# Altium PCB Powerboard.PcbDoc
Units mil, origin at the board's own origin, x right, y up, seen from the top; angles counter-clockwise.
Board outline 3937.01 x 3937.01 mil, 2 copper layers (Top Layer, Bottom Layer); 70 components, 52 nets, 248 pads, 58 vias.
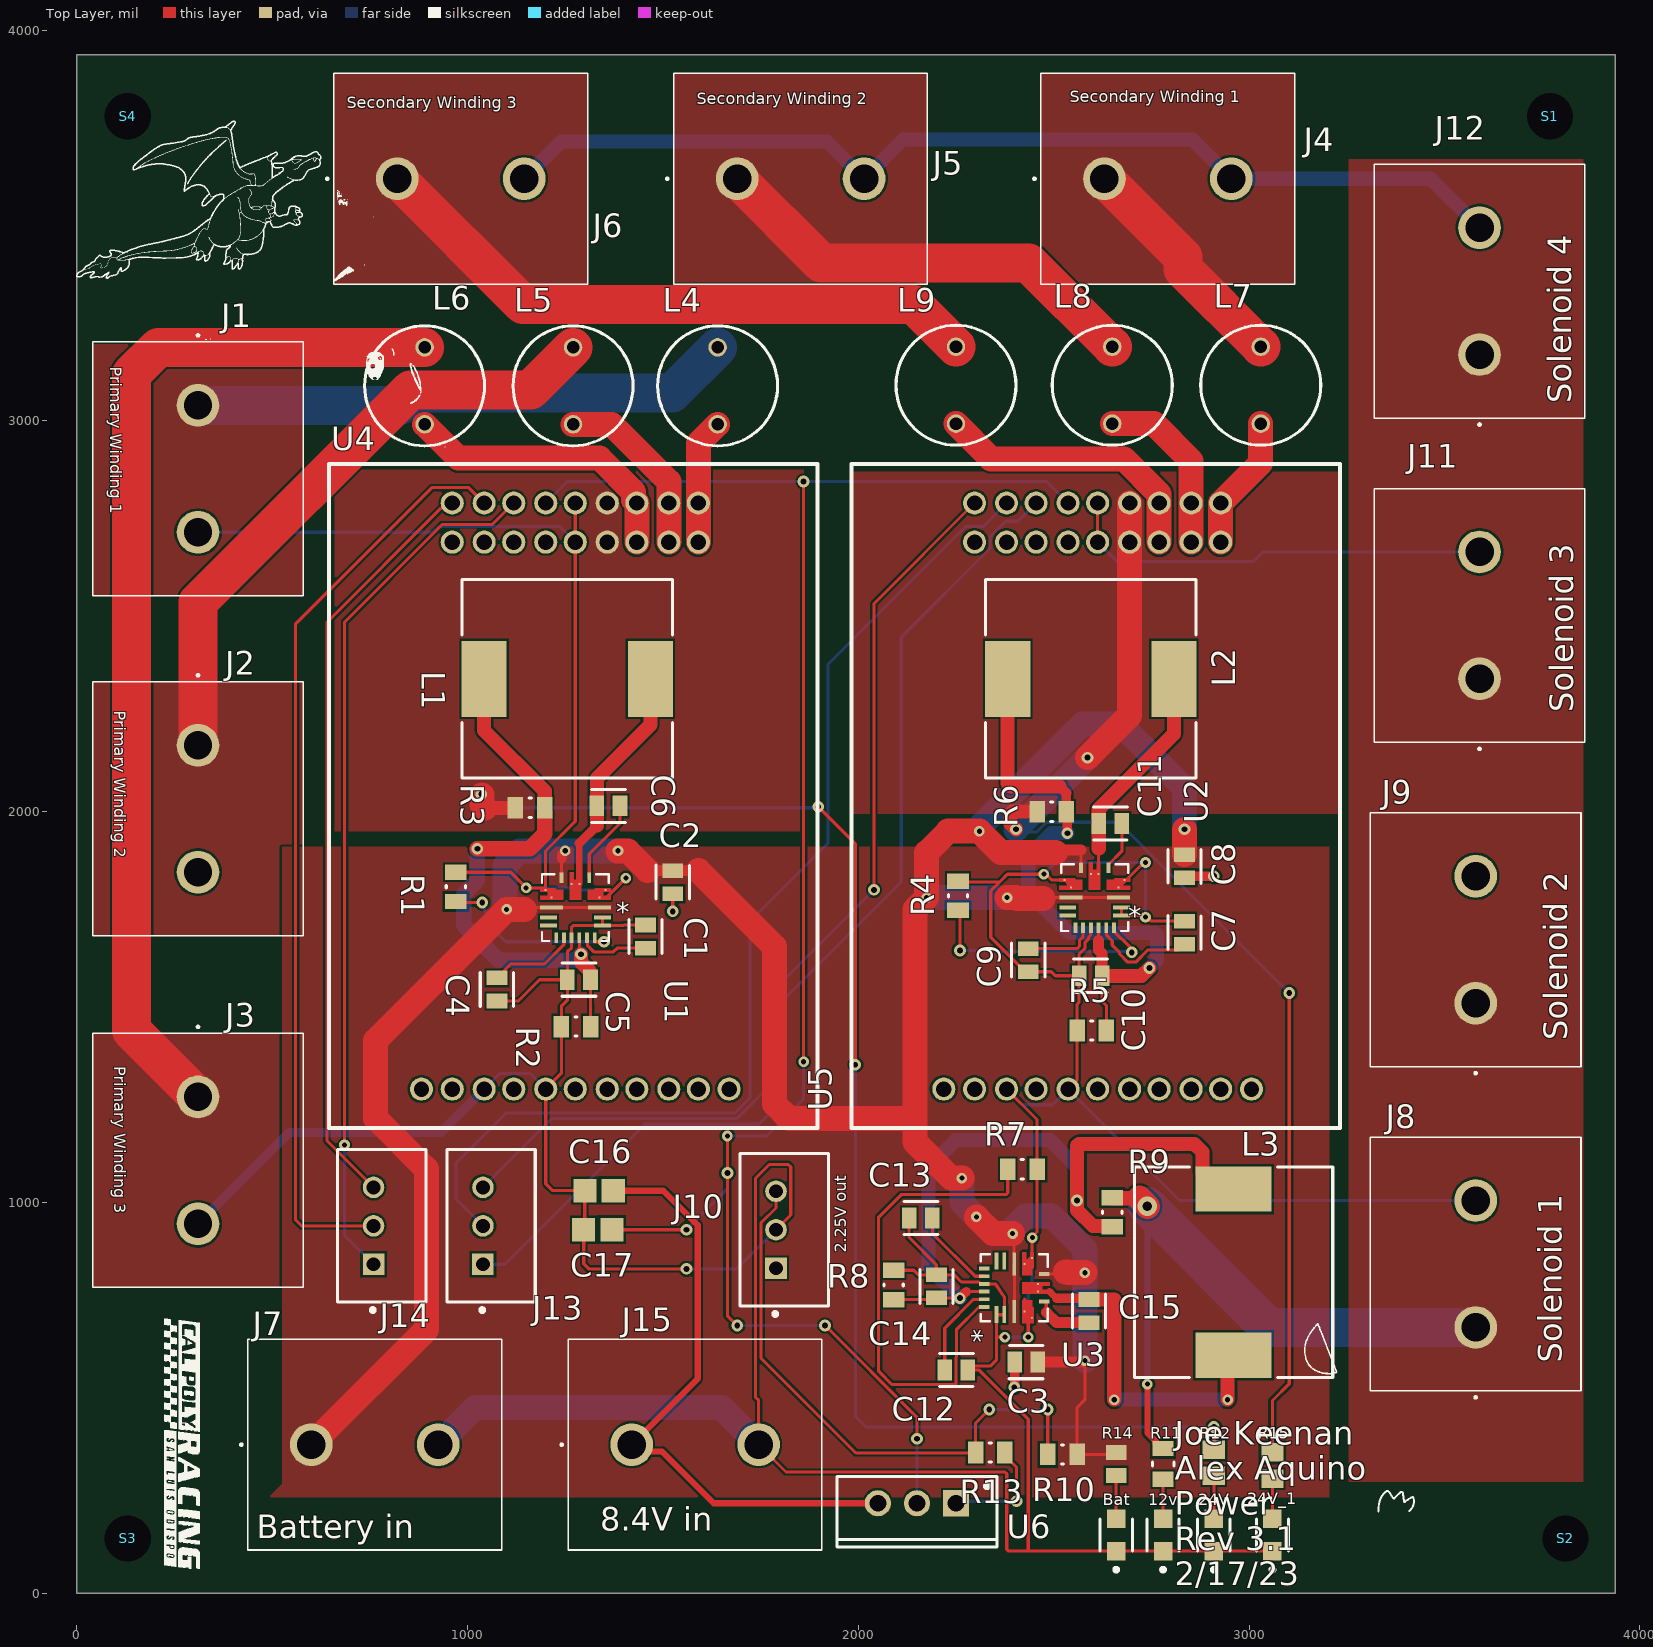
[diagram p0: Top Layer view]
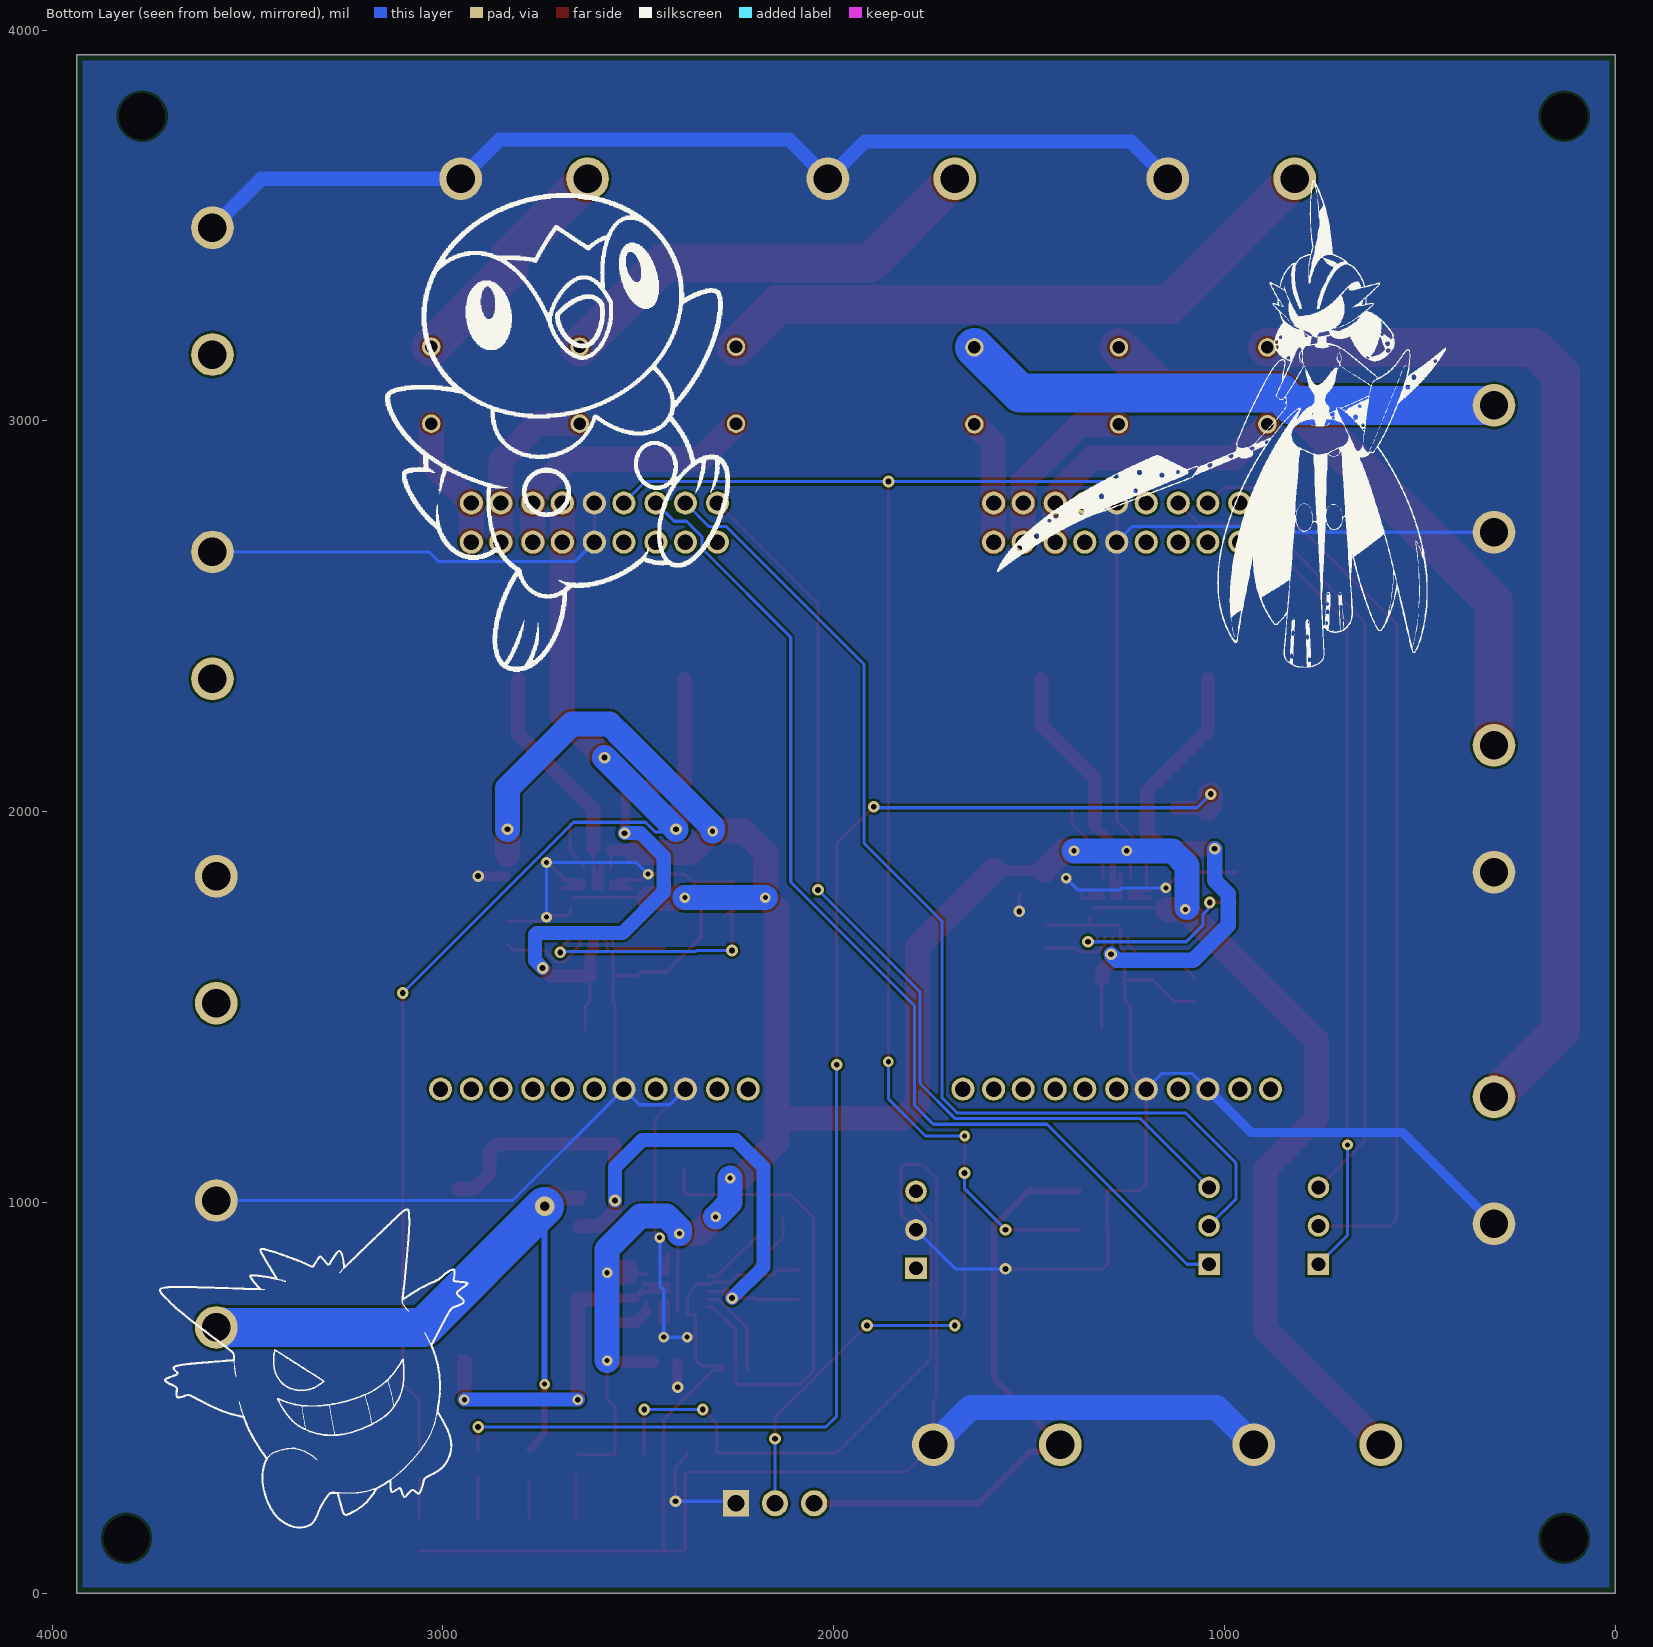
[diagram p1: Bottom Layer view, seen from below]
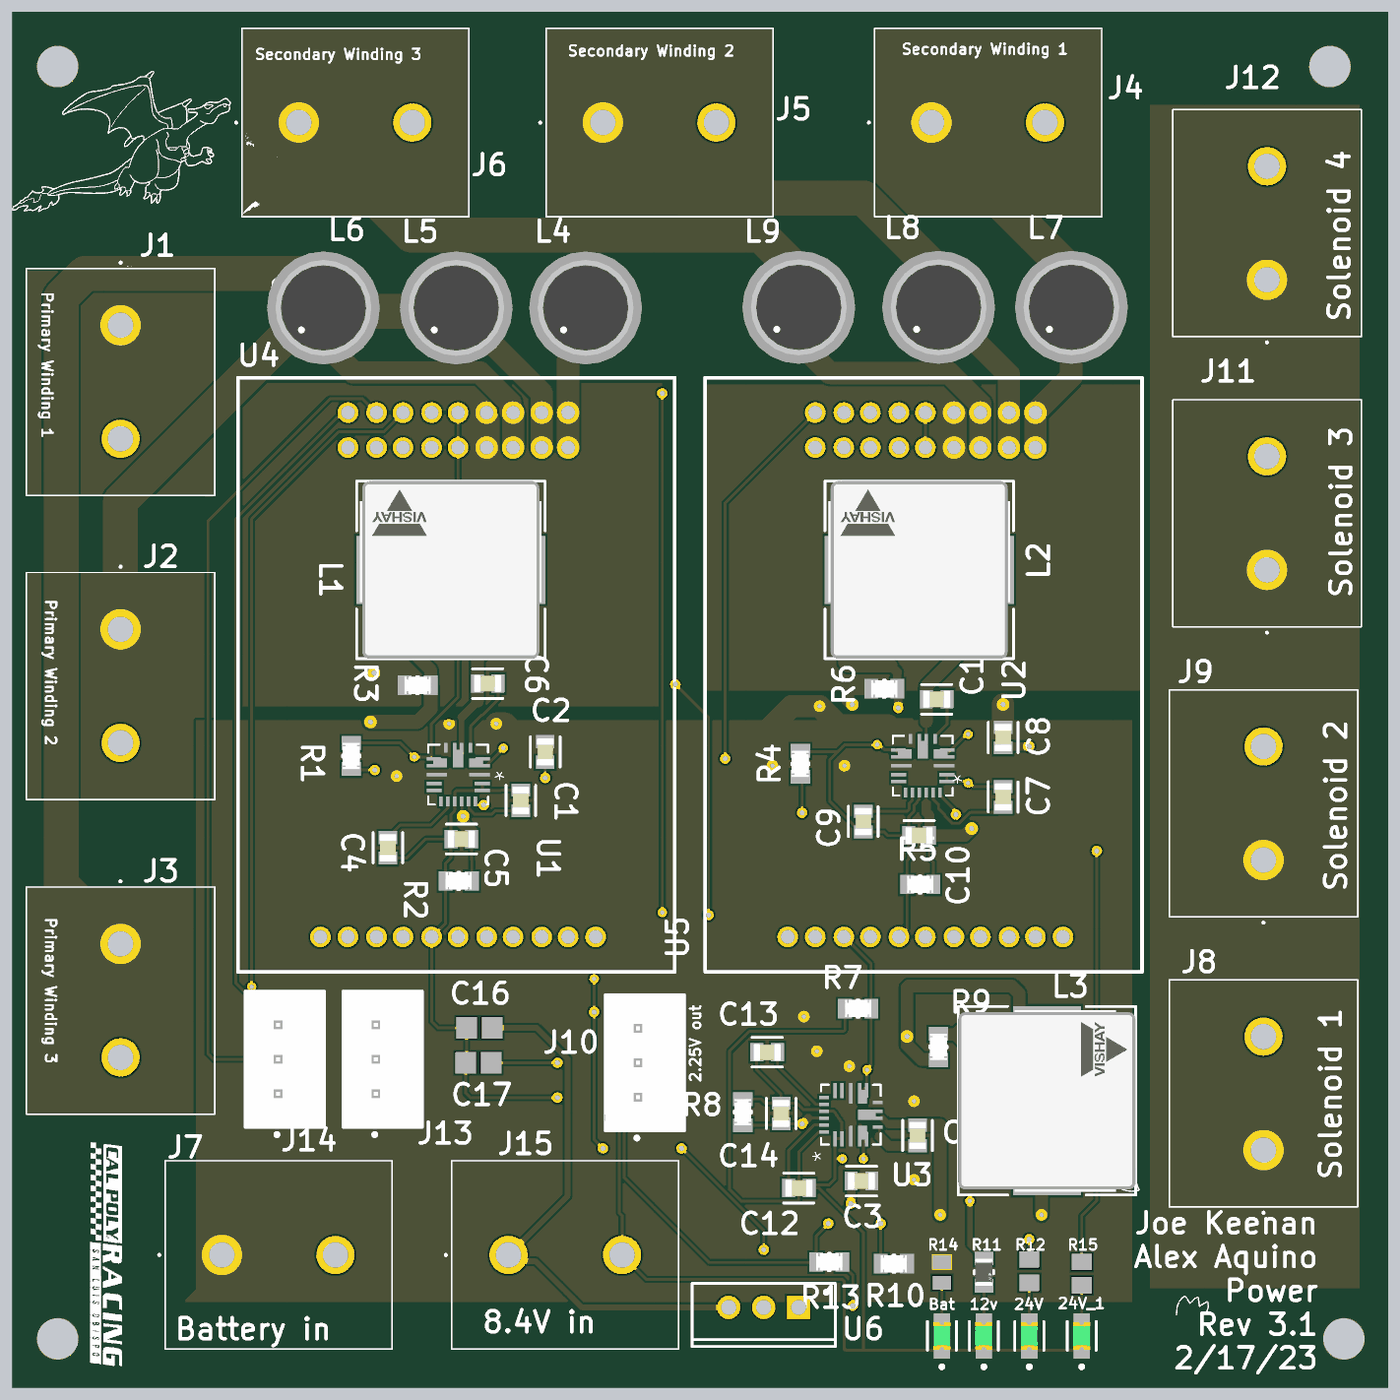
[diagram p2: 3D render of the assembled board from above, using the file's embedded part models]

## Layer stack, top to bottom
Top Solder: solder mask 0.4, Solder Resist, Dk 3.5
Top Layer: signal copper 1.4
Dielectric 1: dielectric 12.6, FR-4, Dk 4.8
Bottom Layer: signal copper 1.4
Bottom Solder: solder mask 0.4, Solder Resist, Dk 3.5

## Board outline
0,0 0,3937.01 3937.01,3937.01 3937.01,0

## Design rules (kind name [scope] priority, off if disabled: settings)
BoardOutlineClearance [All] p1: gap=15 ignorepadtopadclearanceinfootprint=FALSE
Clearance [All] p1: gap=6 ignorepadtopadclearanceinfootprint=FALSE except(0: Arc-Hole Track-Hole SMDPad-Hole THPad-Hole Via-Hole Fill-Hole Poly-Hole Region-Hole Text-Hole)
ComponentClearance [All] p1: gap=1 collisioncheckmode=3 verticalgap=1 showdistances=FALSE
DiffPairsRouting [All] p1: maxlimit=393.7 minlimit=6 mostfreqgap=8 toplayer_minwidth=6 toplayer_maxwidth=15 toplayer_prefwidth=8 bottomlayer_minwidth=6 bottomlayer_maxwidth=15 bottomlayer_prefwidth=8 maxuncoupledlength=500
HoleSize [All] p1: absolutevalues=TRUE maxlimit=265 minlimit=13 maxpercent=80.000 minpercent=20.000
HoleToHoleClearance [All] p1: gap=10 allowstackedmicrovias=FALSE
MinimumAnnularRing [All] p1: minimumring=7
MinimumSolderMaskSliver [All] p1: minsoldermaskwidth=0
PlaneClearance [All] p1: clearance=10
PlaneConnect [All] p1: planeconnectstyle=Direct reliefexpansion=16 reliefentries=4 reliefconductorwidth=6 reliefairgap=6
PolygonConnect [All] p1: connectstyle=Direct reliefconductorwidth=8 reliefentries=4 polygonreliefangle="90 Angle" airgapwidth=6
RoutingCorners [All] p1: cornerstyle=45-Degree minsetback=49.21 maxsetback=49.21
RoutingVias [All] p1: holewidth=15 width=30 viastyle="Through Hole" minholewidth=13 minwidth=27 maxholewidth=100 maxwidth=114
SilkToSilkClearance [All] p1: silktosilkclearance=0
SilkToSolderMaskClearance [IsPad] p1: minsilkscreentomaskgap=6 clearancetoexposedcopper=TRUE
SolderMaskExpansion [All] p1: expansion=2.95 istentingtop=FALSE
Width [All] p1: maxlimit=400 minlimit=6 preferedwidth=8
20 further rules are at their usual default settings.

## Classes and differential pairs
component class PowerboardV2: C1 C2 C3 C4 C5 C6 C7 C8 C9 C10 C11 C12 C13 C14 C15 L1 L2 L3 R1 R2 R3 R4 R5 R6 R7 R8 R9 U1 U2 U3
component class PowerboardV2Sheet2: 12v 24V_1 Bat C16 C17 J1 J2 J3 J4 J5 J6 J7 J8 J9 J10 J11 J12 J13 J14 J15 L4 L5 L6 L7 L8 L9 R10 R11 R12 R13 R14 R15 S1 S2 S3 S4 U4 U5 U6

## Components (designator, comment, footprint, x,y, rotation, side; value= is the part's Value field where it differs from the comment)
12v "LTST-C171GKT" FP-LTST-C171GKT-MFG 2780,148.66 r90 top
24V "LTST-C171GKT" FP-LTST-C171GKT-MFG 2910,148.66 r90 top
24V_1 "LTST-C171GKT" FP-LTST-C171GKT-MFG 3060,148.66 r90 top
Bat "LTST-C171GKT" FP-LTST-C171GKT-MFG 2660,148.66 r90 top
C1 "10 µF" FP-C0805C-DG-MFG 1455.01,1680.47 r90 top value=10uF
C2 "10 µF" FP-C0805C-DG-MFG 1525.01,1819.53 r90 top value=10uF
C3 "10 µF" FP-C0805C-DG-MFG 2429.88,591.34 r0 top value=10uF
C4 "10 µF" FP-C0805C-DG-MFG 1075,1545 r270 top value=10uF
C5 "10 µF" FP-C0805C-DG-MFG 1285.01,1570 r180 top value=10uF
C6 "1 µF" FP-C0805C-DG-MFG 1360.47,2015 r0 top value=10uF
C7 "10 µF" FP-C0805C-DG-MFG 2835.01,1690.47 r90 top value=10uF
C8 "10 µF" FP-C0805C-DG-MFG 2835.01,1860.47 r90 top value=10uF
C9 "10 µF" FP-C0805C-DG-MFG 2435.01,1620 r270 top value=10uF
C10 "10 µF" FP-C0805C-DG-MFG 2594.54,1580 r180 top value=10uF
C11 "1 µF" FP-C0805C-DG-MFG 2645.01,1970 r0 top value=10uF
C12 "10 µF" FP-C0805C-DG-MFG 2250.82,571.34 r0 top value=10uF
C13 "10 µF" FP-C0805C-DG-MFG 2160,960 r180 top value=10uF
C14 "10 µF" FP-C0805C-DG-MFG 2200,785 r90 top value=10uF
C15 "1 µF" FP-C0805C-DG-MFG 2590.35,721.81 r270 top value=10uF
C16 "10uF" CAPC2013X145X48ML20T23 1336.42,1030 r180 top
C17 "10uF" CAPC2013X145X48ML20T23 1333.58,930 r180 top
J1 "Motor winding 1" 19774772 310,3040 r270 top
J2 "Motor winding 2" 19774772 310,2170 r270 top
J3 "Motor winding 3" 19774772 310,1270 r270 top
J4 "Motor winding 1.2" 19774772 2630,3620 r0 top
J5 "Motor winding 2.2" 19774772 1690,3620 r0 top
J6 "Motor winding 3.2" 19774772 820,3620 r0 top
J7 "Battery in (36V)" 19774772 600,380 r0 top
J8 "Solenoid 1" 19774772 3580,680 r90 top
J9 "Solenoid 2" 19774772 3580,1510 r90 top
J10 "2.25 out" FP-B3B-XH-A_LF_SN-MFG 1810,930 r90 top
J11 "Solenoid 3" 19774772 3590,2340 r90 top
J12 "Solenoid 4" 19774772 3590,3170 r90 top
J13 "Hall in 2" FP-B3B-XH-A_LF_SN-MFG 1060,940 r90 top
J14 "Hall in 1" FP-B3B-XH-A_LF_SN-MFG 780,940 r90 top
J15 "8.4 in" 19774772 1420,380 r0 top
L1 "10 µH" FP-IHLP-5050FD-FP_2_945x4-MFG 1255.01,2340 r180 top
L2 "10 µH" FP-IHLP-5050FD-FP_2_945x4-MFG 2595.01,2340 r180 top
L3 "10 µH" FP-IHLP-5050FD-FP_2_945x4-MFG 2960.35,821.34 r90 top
L4 "4.7 µH" WE-TI-LM-STBG 1640,3090 r270 top
L5 "4.7 µH" WE-TI-LM-STBG 1270,3090 r270 top
L6 "4.7 µH" WE-TI-LM-STBG 890,3090 r270 top
L7 "4.7 µH" WE-TI-LM-STBG 3030,3091.57 r270 top
L8 "4.7 µH" WE-TI-LM-STBG 2650,3091.58 r270 top
L9 "4.7 µH" WE-TI-LM-STBG 2250,3091.57 r270 top
R1 "26.1k" FP-CRCW0805-e3-IPC_B 970,1807.56 r90 top
R2 "35k" FP-CRCW0805-e3-IPC_B 1277.57,1450 r180 top
R3 "1Mohm" FP-CRCW0805-e3-IPC_B 1160,2010 r180 top
R4 "26.1k" FP-CRCW0805-e3-IPC_B 2255,1785 r90 top
R5 "35k" FP-CRCW0805-e3-IPC_B 2597.57,1440 r180 top
R6 "1Mohm" FP-CRCW0805-e3-IPC_B 2495,2000 r180 top
R7 "26.1k" FP-CRCW0805-e3-IPC_B 2420,1085 r0 top
R8 "71.5k" FP-CRCW0805-e3-IPC_B 2090.35,788.78 r90 top
R9 "1Mohm" FP-CRCW0805-e3-IPC_B 2650,975 r90 top
R10 "15M" FP-CRCW0805-e3-IPC_B 2522.56,355 r0 top
R11 "15k" FP-RN732A-MFG 2780,330.63 r270 top value=15KΩ
R12 "27k" RESC2013X60X40NL20T25 2910,333.47 r270 top
R13 "1M" FP-CRCW0805-e3-IPC_B 2337.56,360 r180 top
R14 "39k" RESC2013X60X40LL20T25 2660,330.47 r270 top
R15 "27k" RESC2013X60X40NL20T25 3060,326.54 r270 top
S1 "Screw M3" "Screw M3" 3770,3780 r0 top
S2 "Screw M3" "Screw M3" 3810,140 r0 top
S3 "Screw M3" "Screw M3" 130,140 r0 top
S4 "Screw M3" "Screw M3" 130,3780 r0 top
U1 "MPQ4317GRE-33-AEC1-Z" QFN-20_MPQ4317_MNP 1276.03,1754.4 r180 top
U2 "MPQ4317GRE-33-AEC1-Z" QFN-20_MPQ4317_MNP 2605.01,1780 r180 top
U3 "MPQ4317GRE-33-AEC1-Z" QFN-20_MPQ4317_MNP 2399.33,781.5 r90 top
U4 "Motor controller" PCBCOMPONENT_1 645.67,2890 r270 top
U5 "Motor controller" PCBCOMPONENT_1 1982.6,2890 r270 top
U6 "LD1117V50" TO220 2150,230 r180 top

## Footprints (in the part's own frame and the unit in brackets; to place one, negate y for a bottom-side part, rotate by r counter-clockwise, add the part's x,y. Pads: shape width x height; smd on the part's side, far side on the other; paste and mask are expansions set on the pad)
19774772 [mm]
  round 2.775 hole 1.85: 1(0,0) 2(8.25,0)
  silkscreen extent -4.6,-6.85 12.37,6.85, body extent -10,-3.38 10,3.38, height 5.8
CAPC2013X145X48ML20T23 [mm] "Chip Capacitor, 2-Leads, Body 2.00x1.25mm, IPC Low Density"
  rect 1.5x1.55 smd: 1(-0.925,0) 2(0.925,0)
  body extent -1.1,-0.72 1.1,0.72, height 1.45
FP-B3B-XH-A_LF_SN-MFG [mm]
  rect 1.4x1.4 hole 0.9 paste-1000 mask+0: 1(-2.5,0.525)
  round 1.4 hole 0.9 paste-1000 mask+0: 2(0,0.525) 3(2.5,0.525)
  silkscreen extent -5.6,-2.88 4.95,2.87, body extent -5.05,-2.98 5.05,2.98, height 0.25
FP-C0805C-DG-MFG [mm]
  rect 0.95x1.35 smd paste+0 mask+0: 1(-0.75,0) 2(0.75,0)
  silkscreen extent -1.11,-1.08 1.1,1.07, body extent -1.4,-0.85 1.4,0.85, height 0.25
FP-CRCW0805-e3-IPC_B [mil]
  rect 39.63x55.44 smd paste+0 mask+0: 1(-37.43,0) 2(37.44,0)
  silkscreen extent -3,-25 3,25, body extent -67,-38 67,38, height 10
FP-IHLP-5050FD-FP_2_945x4-MFG [mm]
  rect 2.945x4.95 smd paste+0 mask+0: 1(-5.408,0) 2(5.407,0)
  silkscreen extent -6.85,-6.45 6.85,6.45, body extent -6.98,-6.55 6.98,6.55, height 0.25
FP-LTST-C171GKT-MFG [mm]
  rect 1.2x1.2 smd paste+0 mask+0: 1(-1.05,0) 2(1.05,0)
  silkscreen extent -2.37,-1.05 1.05,1.05, body extent -1.75,-0.77 1.75,0.77, height 0.25
FP-RN732A-MFG [mm]
  rect 1x1.35 smd paste+0 mask+0: 1(-1,0) 2(1,0)
  silkscreen extent -0.13,-0.7 0.13,0.7, body extent -1.6,-0.8 1.6,0.8, height 0.25
PCBCOMPONENT_1 [mm]
  round 1.5 hole 1 mask+0.064: 1(2.54,24) 2(5.08,24) 3(2.54,22.08) 4(5.08,22.08) 5(2.54,20) 6(5.08,20) 7(2.54,18.08) 8(5.08,18.08) 9(2.54,16) 10(5.08,16) 11(2.54,14.08) 12(5.08,14.08) 13(2.54,12) 14(5.08,12) 15(2.54,10.08) 16(5.08,10.08) 17(2.54,8) 18(5.08,8) 19(40.64,6) 20(40.64,8) 21(40.64,10.08) 22(40.64,12) 23(40.64,14.08) 24(40.64,16) 25(40.64,18.08) 26(40.64,20) 27(40.64,22.08) 28(40.64,24) 29(40.64,26)
  silkscreen extent 0,0 43.18,31.75
QFN-20_MPQ4317_MNP [mm]
  rect 1.1x0.25 smd paste+0 mask+0: 1(-1.75,1.15) 2(-1.75,0.65) 13(1.75,0.65) 14(1.75,1.15)
  rect 1.5x0.25 smd paste+0 mask+0: 3(-1.55,0) 12(1.55,0)
  rect 0.127x0.127 smd: 4(-1.55,-0.65) 5(-1.95,-1.15) 7(-0.25,-1.55) 8(0.25,-1.55) 10(1.95,-1.15) 11(1.55,-0.65)
  rect 0.25x0.7 smd paste+0 mask+0: 6(-0.9,-1.95) 9(0.9,-1.95) 15(1.25,1.95) 16(0.75,1.95) 17(0.25,1.95) 18(-0.25,1.95) 19(-0.75,1.95) 20(-1.25,1.95)
  Top Layer region: -0.8,-0.525 -2.3,-0.525 -2.3,-0.775 -1.8,-0.775 -1.8,-1.025 -2.3,-1.025 -2.3,-1.275 -1.3,-1.275 -1.2,-1.175 -0.8,-1.175
  Top Layer region: 0.8,-0.525 2.3,-0.525 2.3,-0.775 1.8,-0.775 1.8,-1.025 2.3,-1.025 2.3,-1.275 1.3,-1.275 1.2,-1.175 0.8,-1.175
  Top Layer region: -0.375,-0.525 -0.375,-2.3 -0.125,-2.3 -0.125,-1.8 0.125,-1.8 0.125,-2.3 0.375,-2.3 0.375,-0.525
  silkscreen extent -2.17,-2.17 2.17,2.17, body extent 0,0 0.25,0.25, height 0.25
RESC2013X60X40LL20T25 [mm] "Chip Resistor, 2-Leads, Body 2.00x1.25mm, IPC High Density"
  rect 1x1.35 smd: 1(-0.75,0) 2(0.75,0)
  body extent -1.1,-0.72 1.1,0.72, height 0.6
RESC2013X60X40NL20T25 [mm] "Chip Resistor, 2-Leads, Body 2.00x1.25mm, IPC Medium Density"
  rect 1.2x1.45 smd: 1(-0.85,0) 2(0.85,0)
  body extent -1.1,-0.72 1.1,0.72, height 0.6
"Screw M3" [mm]
  round 0 hole 3: x(0,0)
TO220 [mm] "TO, Thru-Hole, Vertical, Heatsink Mounted; 3 In-Line Leads; Pitch 2.54 mm"
  rect 1.7x1.7 hole 1.1: 1(-2.54,0)
  round 1.7 hole 1.1: 2(0,0) 3(2.54,0)
  silkscreen extent -5.2,-1.75 5.2,2.85, body extent -5.25,-1.8 5.25,2.9, height 19.7
WE-TI-LM-STBG [mm] "THT Inductor, 2-Leads, Body 9.5 x 9.5 mm"
  round 1.2 hole 0.82: 1(-2.5,0) 2(2.5,0)
  silkscreen extent -3.9,-3.9 3.9,3.9, body extent -4.08,-4.09 4.1,4.08, height 7.71

## Part data
12v 24V 24V_1 Bat: library part CMP-22017-000007-1, "LED GREEN CLEAR CHIP SMD", Case Code (Imperial)=0805, Case Code (Metric)=2012, Color=Green, Forward Current=30mA, Forward Voltage=2.1V, Lens Color=Colorless, Max Operating Temperature=85°C, Min Operating Temperature=-55°C, Package Quantity=1, Power Dissipation=100mW, Reverse Voltage=5V, Test Current=10mA, Case/Package=0805, Depth=1.25mm, Dominant Wavelength=569nm, Height=0.8mm, Illumination Color=Green, Lead Free="Lead Free", Length=2mm, Lens Style=Diffused, Lens Transparency=Clear, Luminous Intensity=12mcd, Mount="Surface Mount", Number of Elements=1, Number of LEDs=1, Number of Pins=2, Packaging="Tape and Reel", Power Rating=100mW, Radiation Hardening=No, Viewing Angle=130°, Wavelength=585nm, Width=1.25mm
C1 C2 C3 C4 C5 C6 C7 C8 C9 C10 C11 C12 C13 C14 C15: library part CMP-2007-03243-2, "CAP CER 10UF 10V X5R 0805", 3DS Part Number=220-00001, Capacitance=10uF, Manufacturer=Kemet, Manufacturer Part Number=C0805C106K8PACTU, Package=C0805C-DG, Temperature="-55°C to +85°C", Temperature Characteristic=X5R, Temperature Coefficient=15%, Temperature Range High=+85°C, Temperature Range Low=-55°C, Tolerance=10%, Voltage=10V, Automotive=No, Category=Cap, ComponentLink2Description=Datasheet, ComponentLink2URL=https://content.kemet.com/datasheets/KEM_C1006_X5R_SMD.pdf, Device Class L1="Passive Components", Device Class L2=Capacitors, Device Class L3="Ceramic Capacitors", Digikey Description="CAP CER 10UF 10V X5R 0805", Height=1.4mm, Ipc Land Pattern Name=CAPC200125X125, Lead Free=Yes, Material=Ceramic, Mouser Description="CAP CER 10UF 10V X5R 0805", Octopart=https://octopart.com/c0805c106k8pactu-kemet-98697, RoHS=TRUE, Voltage Rating=10V
C16 C17: library part CMP-2007-03160-1, Manufacturer=Vitramon, Part Number=VJ0805Y103KXBBC31
J1 J2 J3 J4 J5 J6 J7 J8 J9 J11 J12 J15: library part 1977477-2, "Conn Barrier Strip 2 POS 8.25mm Solder ST Thru-Hole 15A/Contact Carton", Package=None, Availability=Unavailable, DigiKey-Purchase-URL=https://snapeda.com/shop?store=DigiKey&id=598501, MF="TE Connectivity", MP=1977477-2, Price=None, SnapEDA_Link=https://www.snapeda.com/parts/1977477-2/TE%20Connectivity%20AMP%20Connectors/view-part/598501/?ref=snap
J10 J13 J14: library part CMP-17439-000014-3, "CONN HEADER VERT 3POS 2.5MM", Color=Natural, Contact Resistance=20mR, Current Rating=3A, Flammability Rating="UL94 V-0", Housing Color=White, Insulation Resistance=1GR, Max Operating Temperature=85°C, Max Voltage Rating (AC)=250V, Min Operating Temperature=-25°C, Connector Type=Header, Contact Finish - Mating=TIN, Contact Material=Brass, Contact Plating=Tin, Contact Shape=Square, Contact Type="Male Pin", Depth=5.75mm, Fastening Type=Detent, Gender=Male, Housing Material=Polyamide, Insulation Color=Natural, Insulation Material=Nylon, Lead Free="Lead Free", Lead Pitch=2.5mm, Length=9.9mm, Max Current Rating=3A, Max Voltage Rating (DC)=250V, Mount="Through Hole", Number of Contacts=3, Number of Positions=3, Number of Rows=1, Orientation=Straight, Packaging=Bulk, Pitch=2.5mm, REACH SVHC="No SVHC", Series=XH, Termination=Solder, Voltage Rating=250V, Voltage Rating (AC)=250V, Wire/Cable Gauge=22AWG
L1 L2 L3: library part CMP-02424-000485-1, "FIXED IND 10UH 10A 17.2 MOHM SMD", Case/Package=5050, Current Rating=10A, DC Resistance (DCR)=17.2mR, Inductance=10uH, Inductance Tolerance=20%, Max DC Current=15.5A, Max Operating Temperature=125°C, Min Operating Temperature=-55°C, Package Quantity=250, Self Resonant Frequency=5MHz, Test Frequency=100kHz, Contact Plating=Tin, Core Material=Metal, Depth=12.9mm, Height=6.5mm, Height - Seated (Max)=0.256inch, Lead Free="Lead Free", Length=13.7mm, Military Standard=Not, Mount="Surface Mount", Number of Pins=2, Packaging="Tape and Reel", Radiation Hardening=No, RMS Current (Irms)=10A, Saturation Current=15.5A, Shielding=Shielded, Termination=SMD/SMT, Tolerance=20%, Width=0.508inch
L4 L5 L6 L7 L8 L9: library part 19R472C, Package=None, Availability=Unavailable, MP=19R472C, Price=None
R1 R2 R3 R4 R5 R6 R7 R8 R9 R10 R13: library part CMP-2001-03630-2, "RES Thick Film, 1MΩ, 1%, 0.125W, 100ppm/°C, 0805", Case Code (Imperial)=0805, Case Code (Metric)=2012, Max Operating Temperature=155°C, Min Operating Temperature=-55°C, Package Quantity=5000, Power Rating=125mW, Resistance=1MR, Temperature Coefficient=100ppm/°C, Tolerance=1%, Voltage Rating=150V, Case/Package=0805, Composition="Thick Film", Contact Plating=Tin, Depth=1.25mm, Height=0.45mm, Lead Free="Lead Free", Length=2mm, Military Standard=Not, Mount="Surface Mount", Number of Pins=2, Packaging="Tape and Reel", Radiation Hardening=No, Termination=SMD/SMT, Voltage Rating (DC)=150V, Weight=0.000194oz, Width=1.25mm
R11: library part CMP-03211-006689-1, "SMD Chip Resistor, Thin Film, 15KΩ, 100 V, 0805 [2012 Metric], 100 mW, 0.1%, RN73 Series RN73C2A15KB", Manufacturer="TE Connectivity", Manufacturer Part Number=RN73C2A15KB, Package=RN732A, Power Rating=0.1W, Resistance=15KΩ, Temperature="-55°C to 155°C", Temperature Coefficient=10ppm/°C, Temperature Range High=155°C, Temperature Range Low=-55°C, Tolerance=0.1%, Voltage Rating=100V, Automotive=No, Category=Res, ComponentLink2Description=Datasheet, ComponentLink2URL=https://www.te.com/commerce/DocumentDelivery/DDEController?Action=showdoc&DocId=Data+Sheet%7F1773270%7FP%7Fpdf%7FEnglish%7FENG_DS_1773270_P.pdf%7F1676162-2, Composition="Thin Film", Device Class L1="Passive Components", Device Class L2=Resistors, Device Class L3="Chip SMD Resistors", Height=0.65mm, Ipc Land Pattern Name=RESC200125X55, Lead Free=Yes, Octopart=https://octopart.com/rn73c2a15kb-te+connectivity-47108263, octopart_url=https://octopart.com/rn73c2a15kb-te+connectivity-47108263, Packaging=Custom, RoHS=TRUE, Series=RN73
R12 R15: library part CMP-2001-00688-1, "ERA-6AED273V", Manufacturer=Panasonic, Part Number=ERA-6AED273V
R14: library part CMP-2001-00636-1, "ERA6AEB393V", Manufacturer=Panasonic, Part Number=ERA6AEB393V
U1 U2 U3: "No Description Available", Mfr_Name="Monolithic Power Systems", Copyright="Copyright (C) 2023 Ultra Librarian. All rights reserved.", Manufacturer_Part_Number=MPQ4317GRE-33-AEC1-Z, RefDes=RefDes, Type=Type
U4 U5: library part Component_1
U6: library part CMP-0244-00472-1, "Fixed Low Drop Positive Voltage Regulator, 5V, 3-Pin TO-220", ComponentLink1Description="Manufacturer URL", ComponentLink1URL=http://www.st.com, ComponentLink2Description=Datasheet, ComponentLink2URL=http://www.st.com/internet/com/TECHNICAL_RESOURCES/TECHNICAL_LITERATURE/DATASHEET/CD00000544.pdf, ComponentLink3Description="Package Specification", ComponentLink3URL=http://www.st.com/internet/com/TECHNICAL_RESOURCES/TECHNICAL_LITERATURE/PACKAGE_INFORMATION/CD00004649.pdf, DatasheetVersion=1/11/2011, PackageDescription="TO, Thru-Hole, Vertical, Heatsink Mounted; 3 In-Line Leads; Pitch 2.54 mm", PackageReference=TO220, PackageVersion=ver3.0

## Via types
v1: diameter 30, hole 15, Top Layer to Bottom Layer, 32 vias
v2: diameter 27, hole 13, Top Layer to Bottom Layer, 25 vias
v3: diameter 50, hole 24, Top Layer to Bottom Layer, 1 vias

## Nets (pads, with @x,y where several pads share a name; then routed paths per layer and width w, separated by ;. In a path a pad name is that pad's centre, name@x,y a point inside that pad or via, vN(x,y) a via of type N, cw(c..) or ccw(c..) an arc to the next point about the centre after c; other vN are vias at no path point)
5V: C17.1 U4.11 U5.11 U6.2 | length 4848
  Top Layer w8: C17.1 v1(1560,930) ; v2(1665,1170) v1(1665,1075) 1665,710 v1(1690,685) ; v2(1860,1360) v1(1860,2845) ; v1(1915,685) 2150,450 v1(2150,395)
  Bottom Layer w8: U4.11 1255,2845 v1(1860,2845) 2481.93,2845 U5.11 ; v1(1560,930) 1665,1035 v1(1665,1075) ; v2(1665,1170) 1765,1170 1860,1265 v2(1860,1360) ; v1(1690,685) v1(1915,685) ; U6.2 v1(2150,395)
"8.4V in": C16.1 J15.1 U6.3 | length 1576.8
  Top Layer w16: C16.1 1501.01,1030 1589,942.01 1589,549 J15.1 1437.84,362.16 1497.84,362.16 1630,230 U6.3
"12V OUT": J8.1 J9.1 J11.1 J12.1 R9.2 R11.1 | length 1708.3
  Top Layer w16: v2(2740,535) 2740,410 2761.43,388.57 2761.43,381.69 2773.11,370 R11.1
  Top Layer w36: R9.2 2651.81,1010.62 2719.38,1010.62
  Top Layer w64: 2719.38,1010.62 v3(2740,990)
  Bottom Layer w16: v2(2740,535) v3(2740,990)
  Bottom Layer w100: v3(2740,990) 3050,680 J8.1
24v: R3.2 R12.1 U4.7 U4.8 | length 3581.2
  Top Layer w8: v1(1035,2045) v1@1037,2043 ; v1(1897.32,2012.68) 1992.35,1917.65 v1(1992.35,1352.42) ; R12.1 v1(2910,425)
  Top Layer w36: 1045,2010 R3.2
  Top Layer w64: v1@1037,2043 1037,2018 1045,2010
  Bottom Layer w8: v1(1035,2045) 1070,2010 1894.64,2010 v1(1897.32,2012.68) ; v1(1992.35,1352.42) 1992.35,452.65 2020,425 v1(2910,425)
"24V OUT 1": R6.2 R15.1 U5.7 U5.8 | length 3158.6
  Top Layer w8: 2390,1995.31 2394.69,2000 ; R15.1 3060,493 3103,536 v1(3103,1536)
  Top Layer w36: 2390,1995.31 2390,1968.39 v1(2403.39,1955) ; 2394.69,2000 R6.2
  Top Layer w64: v1(2586.8,2138.41) 2694.41,2246.02 2694.41,2555.05 U5.8 U5.7
  Bottom Layer w8: v1(2403.39,1955) 2407.6,1950.79 2427.01,1950.79 2429.8,1948 2456.65,1948 2481.65,1973 2666,1973 v1(3103,1536)
  Bottom Layer w64: v1(2403.39,1955) v1(2586.8,2138.41)
36V: C2.2 C3.2 C8.2 J7.1 R10.2 R14.1 U1.3 U1.9 U1.12 U2.3 U2.9 U2.12 U3.3 U3.9 U3.12 | length 7986.3
  Top Layer w8: 1145,1750 1149.4,1754.4 U1.12 U1.3 ; U1.9 1240.59,1879.41 ; v2(2395,920) 2398.4,916.6 2398.4,843.44 U3.12 U3.3 ; 2475,1780 U2.12 U2.3 ; U3.9 2525.31,816.94 2530,821.63 ; U2.9 2569.56,1901.97 ; v2(2580,595) 2580,495 2560,475 R10.2 2655,355 R14.1
  Top Layer w24: 1240.59,1879.41 1240.59,1889.78 1250,1899.19 v2(1250,1900) ; C8.2@2832.77,1887.76 C8.2
  Top Layer w28: 1460.94,1849.06 C2.2 1590.94,1849.06 ; C3.2 v2@2576.34,591.34 ; 2511.97,1901.97 2569.56,1901.97
  Top Layer w64: J7.1 895,675 895,1085 764.7,1215.3 764.7,1414.7 v2(1100,1750) 1145,1750 ; v2(1385,1900) 1410,1900 1460.94,1849.06 ; 1590.94,1849.06 1785,1655 1785,1252.49 1822.49,1215 2145,1215 ; v2(2265,1062) 2238,1062 2145,1155 2145,1215 ; v2(2302.07,962.93) 2345,920 v2(2395,920) ; v2(2381.05,1780) 2404.16,1780 2406.16,1778 2473,1778 ; 2505,1895 2365,1895 v2(2310,1950) 2230,1950 2175,1895 v2(2175,1780) 2145,1750 2145,1215 ; 2530,821.63 2536.63,821.63 2538.26,820 v2(2580,820) ; C8.2 v1(2835,1955)
  Bottom Layer w64: v2@1095.84,1754.16 1095.84,1862.51 1133.33,1900 v2(1250,1900) v2(1385,1900) ; v2(2175,1780) v2(2381.05,1780) ; v2(2265,1062) 2265,1000 v2(2302.07,962.93) ; v2(2310,1950) 2310,1960.6 2537,2187.6 2574.4,2225 2670,2225 2835,2060 v1(2835,1955) ; v2(2395,920) 2395,932.23 2427.77,965 2495,965 2580,880 v2(2580,820) v2(2580,595)
GND: 12v.1 24V.1 24V_1.1 Bat.1 C1.2 C2.1 C3.1 C4.2 C5.2 C7.2 C8.1 C9.2 C10.2 C12.2 C13.2 C14.2 C16.2 C17.2 J1.2 J2.2 J3.2 J4.2 J5.2 J6.2 J7.2 J8.2 J9.2 J10.2 J11.2 J12.2 J15.2 R1.2 R2.2 R4.2 R5.2 R7.2 R8.2 R13.1 U1.1 U1.2 U1.4 U1.5 U1.10 U1.11 U1.17 U2.1 U2.2 U2.4 U2.5 U2.10 U2.11 U2.17 U3.1 U3.2 U3.4 U3.5 U3.10 U3.11 U3.17 U4.9 U4.10 U4.21 U4.23 U5.9 U5.10 U5.21 U5.23 U6.1 | length 18753.6
  Top Layer w8: R1.2 1110,1845 v2(1150,1805) 1150.13,1804.87 1194.08,1804.87 ; C4.2 1129.53,1515.47 1184.06,1570 C5.2 ; U1.10 1199.26,1899.26 1275.59,1975.59 U4.10 U4.9 ; U1.11 1215.01,1783.94 ; U1.4 1355,1780 v2(1405,1830) ; U1.2 U1.1 ; C1.2 1399.88,1710 1399,1709.12 U1.1 ; v1(1525,1745) C2.1 ; v1(1560,830) 1310,830 1297.17,842.83 C17.2 1300,932.83 C16.2 1217.5,1030 1200,1047.5 U4.23 1240.14,1330.14 R2.2 1240.14,1502 1255.48,1517.34 C5.2 ; J10.2 1827,967.67 1827,1091 1820.87,1097.13 1772.5,1097.13 1737,1061.63 1737,501 1744.8,493.2 J15.2 1814.8,310 2375.31,310 2380,305.31 2380,112.01 2384.69,107.32 2435,107.32 ; R8.2 2142,826.21 2153.68,814.53 C14.2 ; C13.2@2130,960 2130,910 2199.46,840.54 2199.46,815.07 C14.2 ; R4.2 2257.44,1820 2361.65,1820 ; R13.1 2375,352.09 2405,322.09 v1(2405,235) ; v2(2375,655) v2(2375,655) 2354.04,655.05 ; U5.21 2457.44,1212.01 R7.2 2457.44,924.19 2445,911.75 v2@2445,910 ; v1(2399.14,526.97) v1@2400.35,528.19 ; U3.4 2435,710.4 ; 2424.92,752.08 2435,742 2435,710.4 ; U3.11 2440.67,858.27 U3.10 2444.61,909.01 v2(2445.5,909.9) ; v2(2435,655) 2435,710.4 ; U3.5 2440.67,704.73 2435,710.4 ; U5.23 2560.14,1313.21 R5.2 2560.14,1507 2565.01,1511.87 C10.2 ; U2.11 2543.99,1809.54 U2.10 2494.86,1825.29 2480.14,1840 v2(2475,1840) 2381.65,1840 2361.65,1820 ; U2.17 2594.24,1702.31 2594.24,1683.18 2589.47,1678.41 2589.47,1674.47 2580,1665 2580,1649.73 2565.01,1634.74 C10.2 ; U5.10 U5.9 ; U2.4 2730.44,1870 v2(2735,1870) ; U2.2 U2.1 2725.14,1734.71 2729.86,1730 v2(2735,1730) 2740.14,1730 2750.14,1720 C7.2 ; C8.1 C8.1@2839.07,1835 ; 24V_1.1 24V.1 2844,107.32 12v.1 2719,107.32 Bat.1 2435,107.32 ; C5.2 1255.48,1641.15 1266.19,1651.85 U1.17 1266.19,1704.43 1270.87,1709.12 U1.1 ; C14.2 2245.47,814.53 2263.89,796.11 2308.93,796.11 2313.7,791.34 U3.17 2351,791.34 2373.73,758 U3.2 U3.1 2354.04,655.05 ; 2354.04,655.05 2354.04,597.5 2337.54,581 2280.35,581 C12.2 2308.66,571.34 2435,445 2435,107.32 ; 2361.65,1820 2339.05,1797.4 2339.05,1678.56 2427.14,1590.47 C9.2 2494,1590.47 2504.47,1580 C10.2
  Top Layer w24: v1@2400.35,528.19 C3.1 ; C8.1@2839.07,1835 v1(2910,1835)
  Bottom Layer w8: J1.2 911.2,2715.2 926,2730 1235.59,2730 U4.10 ; U4.21 1082.52,1330 1160,1330 U4.23 ; v2(1150,1805) 1262.57,1805 1267.57,1800 1375,1800 v2(1405,1830) ; v1(1560,830) 1689.33,830 J10.2 ; U6.1 2255,235 v1(2405,235) ; v2(2375,655) v2(2435,655) 2435,775.68 2445,785.68 2445,909.4 v2(2445.5,909.9) ; U5.21 2419.45,1250 2496.93,1250 U5.23 2822.13,1004.8 J8.2 ; v2(2475,1840) 2505,1870 v2(2735,1870) v2(2735,1730) ; U5.10 2662.52,2640 3010.95,2640 3035.95,2665 3385,2665 3385.2,2664.8 J11.2
  Bottom Layer w24: J3.2 543.66,1178.85 931.37,1178.85 U4.21
  Bottom Layer w36: J6.2 1239.8,3715 1919.8,3715 J5.2 2114.8,3720 2854.8,3720 J4.2 3464.8,3620 J12.2
  Bottom Layer w64: J7.2 1019.8,475 1649.8,475 J15.2
"Hall 1": J14.1 U4.13 | length 2233.7
  Top Layer w8: v2(685,1147.35) 685,2485 935,2735 1063.11,2735 U4.13
  Bottom Layer w8: v2(685,1147.35) 685,915.9 J14.1
"Hall 1.2": J13.1 U5.13 | length 2756.7
  Bottom Layer w8: J13.1 1095.57,841.57 1454,1200 1745,1200 1793.24,1248.24 1793.24,1503.24 2110,1820 2110,2446.54 2337.09,2673.63 2337.09,2703.54 2376.85,2743.3 2408.34,2743.3 U5.13
"Hall 2": J14.2 U4.15 | length 2374.8
  Top Layer w8: J14.2 575,940 560,955 560,2481 908.53,2829.53 1002.99,2829.53 U4.15
"Hall 2.2": J13.2 U5.15 | length 2831.2
  Bottom Layer w8: J13.2 970,1009.33 970,1100 1099,1229 1683.99,1229 1722.82,1267.83 1722.82,1719.85 1922.32,1919.35 1922.32,2377.32 2274.53,2729.53 2318.98,2729.53 U5.15
"Hall 3": J14.3 U4.17 | length 1943
  Top Layer w8: J14.3 640,1157.75 640,2485 931.45,2776.45 933.26,2776.45 946.81,2790 U4.17
"Hall 3.2": J13.3 U5.17 | length 2550.3
  Top Layer w8: v1(2040,1800) 2040,2532.44 U5.17
  Bottom Layer w8: J13.3 1215.9,1215 1689.79,1215 1779.24,1304.46 1779.24,1539.24 v1(2040,1800)
MW1: J1.1 L4.1 | length 1391.5
  Bottom Layer w100: J1.1 825.82,3040 857.02,3071.2 1522.77,3071.2 L4.1
MW1.2: J4.1 L7.1 | length 595.7
  Top Layer w100: J4.1 2830.89,3419.11 2830.89,3389.11 L7.1
MW2: J2.1 L5.1 | length 1596.3
  Top Layer w100: J2.1 310,2536.02 853.55,3079.57 1161.15,3079.57 L5.1
MW2.2: J5.1 L8.1 | length 1138.1
  Top Layer w100: J5.1 1905.89,3404.11 2435.89,3404.11 L8.1
MW3: J3.1 L6.1 | length 2698.8
  Top Layer w100: J3.1 140,1440 140,3120 208.43,3188.43 L6.1
MW3.2: J6.1 L9.1 | length 1608.1
  Top Layer w100: J6.1 1141.89,3298.11 2141.89,3298.11 L9.1
Net12v_2: 12v.2 R11.2 | length 101.3
  Top Layer w8: 12v.2 R11.2
Net24V_1_2: 24V_1.2 R15.2 | length 103.1
  Top Layer w8: 24V_1.2 R15.2
Net24V_2: 24V.2 R12.2 | length 110
  Top Layer w8: 24V.2 R12.2
NetBat_2: Bat.2 R14.2 | length 110.9
  Top Layer w8: Bat.2 R14.2
NetC1_1: C1.1 U1.19 | length 179.4
  Top Layer w8: U1.19 1306.49,1676.71 1306.49,1658.11 1323.28,1641.32 1373.18,1641.32 1382.81,1650.94 C1.1
NetC4_1: C4.1 U1.16 | length 224.8
  Top Layer w8: C4.1 1110.47,1610 1197,1610 1246.5,1659.5 U1.16
NetC6_1: C6.1 L1.1 U1.7 U1.8 | length 619.7
  Top Layer w8: U1.8 U1.7
  Top Layer w16: U1.7 1285.88,1919.12
  Top Layer w24: 1285.88,1919.12 1330.94,1964.19
  Top Layer w36: 1330.94,1964.19 C6.1 1330.94,2085.54 1467.9,2222.5 L1.1
NetC6_2: C6.2 U1.6 | length 216.5
  Top Layer w8: U1.6 1311.48,1891.78 1344.7,1925 1345,1925 1390,1970 C6.2
NetC7_1: C7.1 U2.19 | length 275.4
  Top Layer w8: U2.19 2635.47,1702.31 2635.47,1683.48 2650,1668.94 2650,1658.44 2668.44,1640 2668.44,1636.2 2689.64,1615 2710.36,1615 2741.6,1646.24 2820.31,1646.24 C7.1
NetC9_1: C9.1 U2.16 | length 185.1
  Top Layer w8: C9.1 2560,1649.53 2566,1655.53 2566,1670.8 2575.47,1680.27 U2.16
NetC11_1: C11.1 L2.1 U2.7 U2.8 | length 598.6
  Top Layer w8: U2.8 U2.7 2614.85,1905 2615.48,1905.63
  Top Layer w36: 2615.48,1905.63 C11.1 2615.48,2007 2807.9,2199.42 L2.1
NetC11_2: C11.2 U2.6 | length 127.3
  Top Layer w8: U2.6 2640.46,1864.84 2674.54,1898.92 C11.2
NetC12_1: C12.1 U3.19 | length 238.7
  Top Layer w8: C12.1 2221.29,678.26 2295,751.96 U3.19
NetC13_1: C13.1 U3.16 | length 217.9
  Top Layer w8: C13.1 2189.53,920.5 2299,811.03 U3.16
NetC15_1: C15.1 L3.1 U3.7 U3.8 | length 888.9
  Top Layer w8: U3.8 U3.7 2489.88,771.65 ; L3.1@2945,593.1 L3.1
  Top Layer w18: 2489.88,771.65 2495.55,765.97 2496.09,765.97 2507.06,755 2507.88,755
  Top Layer w24: 2507.88,755 2586.69,755 C15.1
  Top Layer w36: C15.1 2655,751.34 v2(2655,495) ; v2(2945,495) L3.1@2945,593.1
  Bottom Layer w36: v2(2655,495) v2(2945,495)
NetC15_2: C15.2 U3.6 | length 151.9
  Top Layer w8: U3.6 2480.26,746.05 2481.18,745.13 2481.18,718.82
  Top Layer w28: 2481.18,718.82 2507.71,692.29 C15.2
NetJ10_3: J10.3 R10.1 R13.2 | length 1482.4
  Top Layer w8: J10.3 1789.33,985.83 1751,947.5 1751,601.57 1993.78,358.78 2298.91,358.78 R13.2 2300.13,435.13 v1(2335,470) ; v1(2485,470) 2485,355.13 R10.1
  Bottom Layer w8: v1(2335,470) v1(2485,470)
NetL4_2: L4.2 U4.1 U4.2 | length 322.1
  Top Layer w64: U4.2 U4.1 1590.55,2942.12 L4.2
NetL5_2: L5.2 U4.3 U4.4 | length 460.7
  Top Layer w64: L5.2 1368.43,2991.57 1514.96,2845.04 U4.4
NetL6_2: L6.2 U4.5 U4.6 | length 738.2
  Top Layer w64: L6.2 976.8,2904.77 1338.21,2904.77 1425.01,2817.97 1425.01,2798.06 U4.5 U4.6
NetL7_2: L7.2 U5.1 U5.2 | length 345.6
  Top Layer w64: U5.2 U5.1 3030,2892.52 L7.2
NetL8_2: L8.2 U5.3 U5.4 | length 449.4
  Top Layer w64: L8.2 2756.85,2993.15 2851.89,2898.11 U5.4
NetL9_2: L9.2 U5.5 U5.6 | length 717.9
  Top Layer w64: L9.2 2339.87,2903.28 2680.13,2903.28 2770,2813.4 U5.5 U5.6
NetR1_1: R1.1 U1.20 | length 479.7
  Top Layer w8: R1.1 972.65,1767.48 v1(1037.33,1767.48) ; U1.20 1325.26,1667 v1(1349,1667)
  Bottom Layer w8: v1(1037.33,1767.48) 1041.54,1763.27 1041.54,1749.93 1055,1736.48 1055,1709.5 1097.5,1667 v1(1349,1667)
NetR4_1: R4.1 U2.20 | length 659.2
  Top Layer w8: v1(2260,1645) 2260,1742.56 R4.1 2262.91,1747.56 R4.1@2278.72,1731.75 ; U2.20 2654.23,1694.37 2695.79,1652.81 2695.79,1644.21 v1(2700,1640)
  Bottom Layer w8: v1(2260,1645) 2350,1645 2352.5,1642.5 2697.5,1642.5 v1(2700,1640)
NetR7_1: R7.1 U3.20 | length 1258.9
  Top Layer w8: U3.20 2309,732.27 2251,674.27 2250,534 2085.8,534 2052,567.8 2052,962 2110,1020 2377.88,1020 2382.57,1024.69 R7.1
NetU4_20: U4.20
NetU4_22: U4.22
NetU5_20: U5.20
NetU5_22: U5.22
"SW 12": C14.1 L3.2 R8.1 R9.1 U3.18 | length 1885.1
  Top Layer w8: R8.1 2150,751.34 2150.47,751.81 C14.1@2200,751.81 ; C14.1 2200.47,755 v1(2259.88,755) ; 2276.53,771.65 U3.18 ; 2560,1145 2564.69,1149.69
  Top Layer w24: v1(2259.88,755) 2276.53,771.65
  Top Layer w36: 2560,1145 v1(2560,1005) 2560,980 2600.62,939.38 2648.19,939.38 R9.1 ; 2564.69,1149.69 2859.82,1149.69 2880.91,1128.6 2880.91,1074.21 2920.88,1034.24 L3.2
  Bottom Layer w36: v1(2259.88,755) 2180,834.88 2180,1090 2250,1160 2490,1160 2560,1090 v1(2560,1005)
"SW 24-1": C5.1 L1.2 R2.1 R3.1 U1.18 | length 1442.2
  Top Layer w8: U1.18 1286.8,1676.71 1286.8,1638.2 v1(1290,1635) ; C5.1 1314.54,1509.47 1315.01,1509 R2.1
  Top Layer w36: L1.2 1042.12,2207.88 1197.43,2052.57 R3.1 ; v1(1290,1635) 1290,1614.7 1313.84,1590.86 1313.84,1570.7 C5.1
  Top Layer w40: v1(1025,1905) 1158.88,1905 1197.43,1943.55 R3.1
  Bottom Layer w40: v1(1025,1905) 1025,1824.32 990,1789.32 990,1709.5 1079.5,1620 1275,1620 v1(1290,1635)
"SW 24-2": C10.1 L2.2 R5.1 R6.1 U2.18 | length 1605.9
  Top Layer w8: 2382.12,2073.02 2390.13,2065 ; R6.1@2522.68,1982.33 2528.95,1982.33 R6.1@2535,1976.28 ; U2.18 2614.85,1670.15 2615,1670 ; C10.1 2624.07,1514.94 2635.01,1504 R5.1
  Top Layer w24: R6.1 2532.44,2047.75 ; v1(2535,1945) R6.1@2535,1976.28
  Top Layer w26: 2515.18,2065 2532.44,2047.75
  Top Layer w28: 2615,1670 2615,1646.07 2624.07,1637 C10.1
  Top Layer w36: 2382.12,2073.02 L2.2 ; 2390.13,2065 2515.18,2065 ; C10.1 2725,1580 v1(2745,1600)
  Bottom Layer w8: 2760,1690 2764.69,1685.31
  Bottom Layer w36: v1(2535,1945) 2494.96,1945 2435,1885.04 2435,1795 2540,1690 2760,1690 ; v1(2745,1600) 2764.69,1619.69 2764.69,1685.31
pads on no net: J10.1 S1.x S2.x S3.x S4.x U1.13 U1.14 U1.15 U2.13 U2.14 U2.15 U3.13 U3.14 U3.15 U4.12 U4.14 U4.16 U4.18 U4.19 U4.24 U4.25 U4.26 U4.27 U4.28 U4.29 U5.12 U5.14 U5.16 U5.18 U5.19 U5.24 U5.25 U5.26 U5.27 U5.28 U5.29

## Polygon pours and split planes (outlines as drawn)
MW1.2 on Top Layer "MW1.2_L01_P010" (solid, pour order 10): 2467.4,3350.32 3117.01,3350.32 3117.01,3889.69 2467.4,3889.69
MW2.2 on Top Layer "MW2.2_L01_P009" (solid, pour order 9): 1527.4,3889.69 2177.01,3889.69 2177.01,3350.32 1527.4,3350.32
MW3.2 on Top Layer "MW3.2_L01_P008" (solid, pour order 8): 1307.01,3350.32 1307.01,3889.69 657.4,3889.69 657.4,3355.9 652.9,3351.4
MW1 on Top Layer "MW1_L01_P007" (solid, pour order 7): 573.7,2550.05 578.1,2554.45 578.1,3196.3 43.7,3196.3 40.32,3199.68 40.32,2552.99
MW2 on Top Layer "MW2_L01_P006" (solid, pour order 6): 579.69,1682.99 579.69,2332.6 40.32,2332.6 40.32,1682.99
MW3 on Top Layer "MW3_L01_P005" (solid, pour order 5): 40,1430 580,1430 580,783.31 579.69,782.99 40.32,782.99
36V on Top Layer "36V_L01_P002" (solid, pour order 2): 3205,1910 3205,245 490,245 525,280 525,1910 635,1910
24v on Top Layer "24V_L01_P000" (solid, pour order 0): 1860,1950 1860,2875 660,2875 660,1950
"24V OUT 1" on Top Layer "24V_OUT_1_L01_P001" (solid, pour order 1): 3230,1995 3230,2870 1985,2870 1985,1995
"12V OUT" on Top Layer "12V_OUT_L01_P003" (solid, pour order 3): 3855,285 3855,3670 3255,3670 3255,285
GND on Bottom Layer "GND_L02_P004" (solid, pour order 4): 4030,-80 4030,4020 4010,4000 -60,4000 -60,-80

## Silkscreen, mask and mechanical layers (free items; w line width, h text height)
Top Overlay:
  drawing of 71 lines, arcs and shapes, not listed
  text "Secondary Winding 1" at 2541,3816 h30
  text "Secondary Winding 2" at 1586,3811 h30
  text "Secondary Winding 3" at 691,3801 h30
  text "Primary Winding 1" at 86,3139 h30 r270
  text "Solenoid 4" at 3825,3045 h60 r90
  text "Primary Winding 2" at 96,2259 h30 r270
  text "Solenoid 3" at 3830,2255 h60 r90
  text "Solenoid 2" at 3815,1415 h60 r90
  text "Primary Winding 3" at 96,1349 h30 r270
  text "2.25V out" at 1969,871 h30 r90
  text "Solenoid 1" at 3800,590 h60 r90
  text "8.4V in" at 1340,160 h60
  text "Battery in" at 460,139.99 h60
  text "Joe Keenan / Alex Aquino / Power / Rev 3.1 / 2/17/23" at 2810.11,20 h60
Bottom Overlay:
  drawing of 9 lines, arcs and shapes, not listed
Mechanical 1:
  the board outline again, w10

## Text inside footprints (layer, text, board x,y; h text height)
U1: Mechanical 13 "*" at 1326.53,1740.02 h50 r180; Top Overlay "*" at 1415.01,1790 h50 r180
U2: Mechanical 13 "*" at 2655.5,1765.62 h50 r180; Top Overlay "*" at 2725.01,1780 h50 r180
U3: Mechanical 13 "*" at 2384.95,731 h50 r90; Top Overlay "*" at 2340.35,641.34 h50 r90